# Altium PCB PCB1.PcbDoc
Units mm, origin at the board's own origin, x right, y up, seen from the top; angles counter-clockwise.
Board outline 160 x 100 mm, 2 copper layers (Top Layer, Bottom Layer), stack 1.569 mm thick; 4 components, 0 nets, 86 pads, 0 vias.
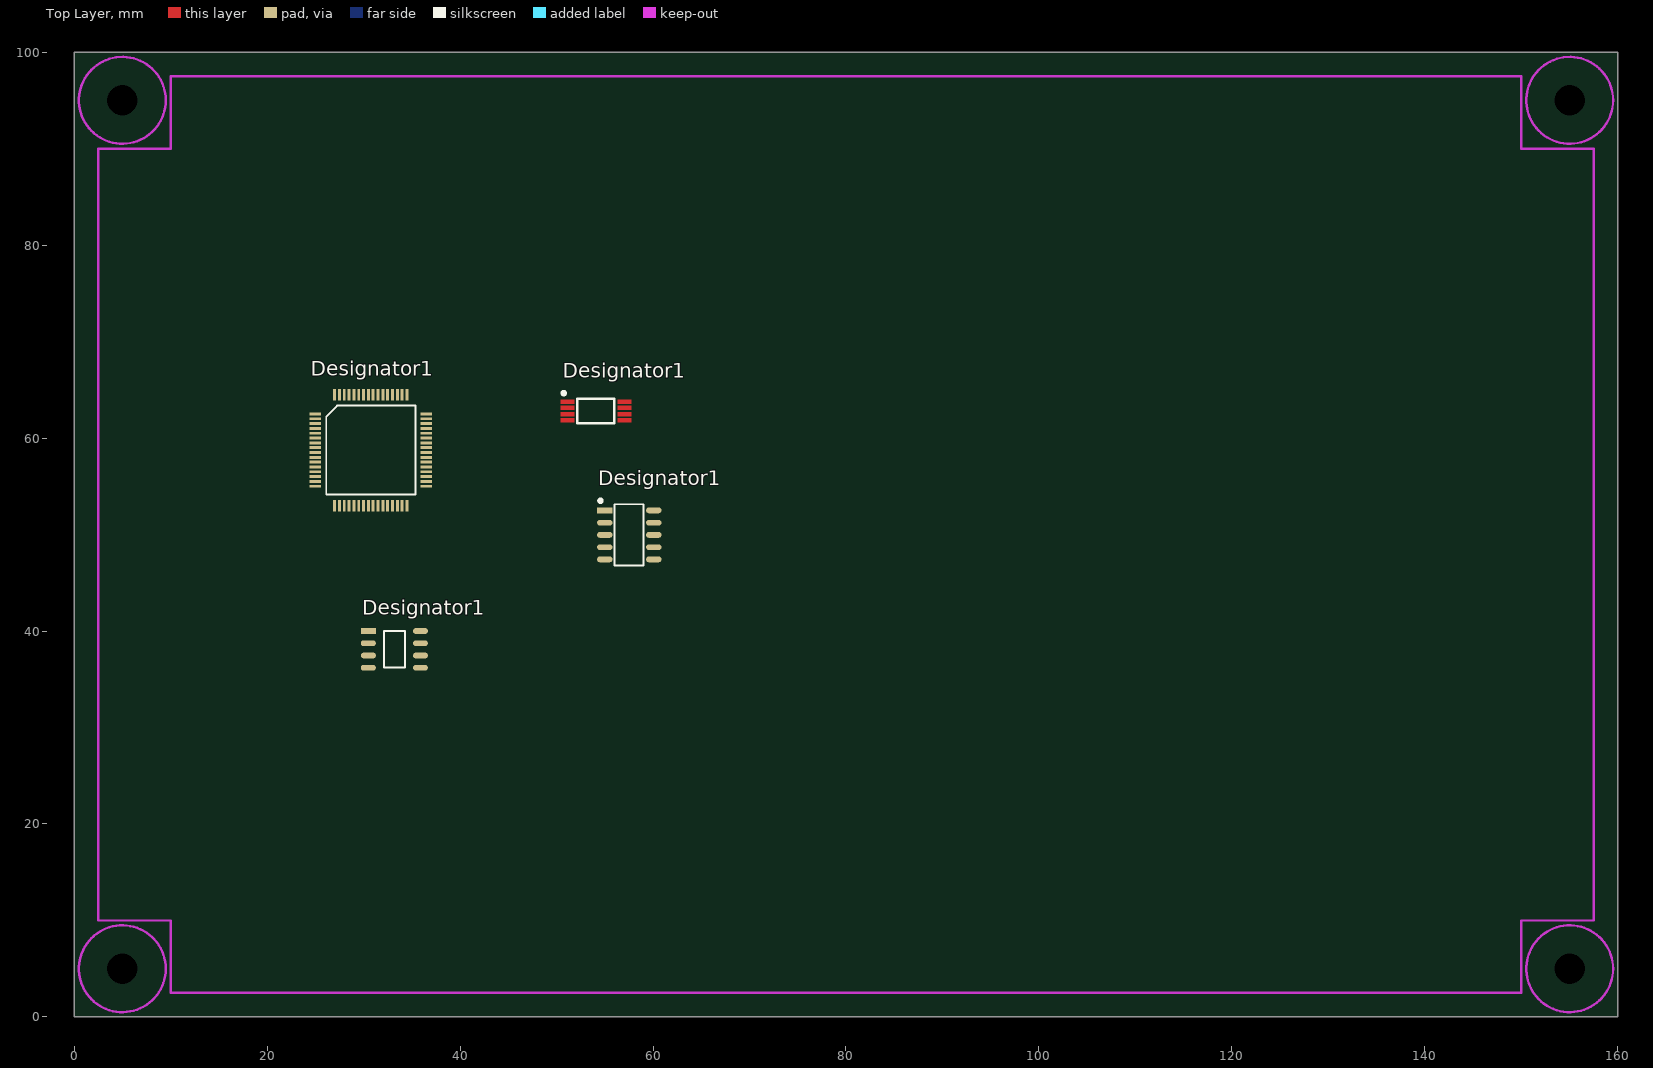
[diagram p0: Top Layer view]
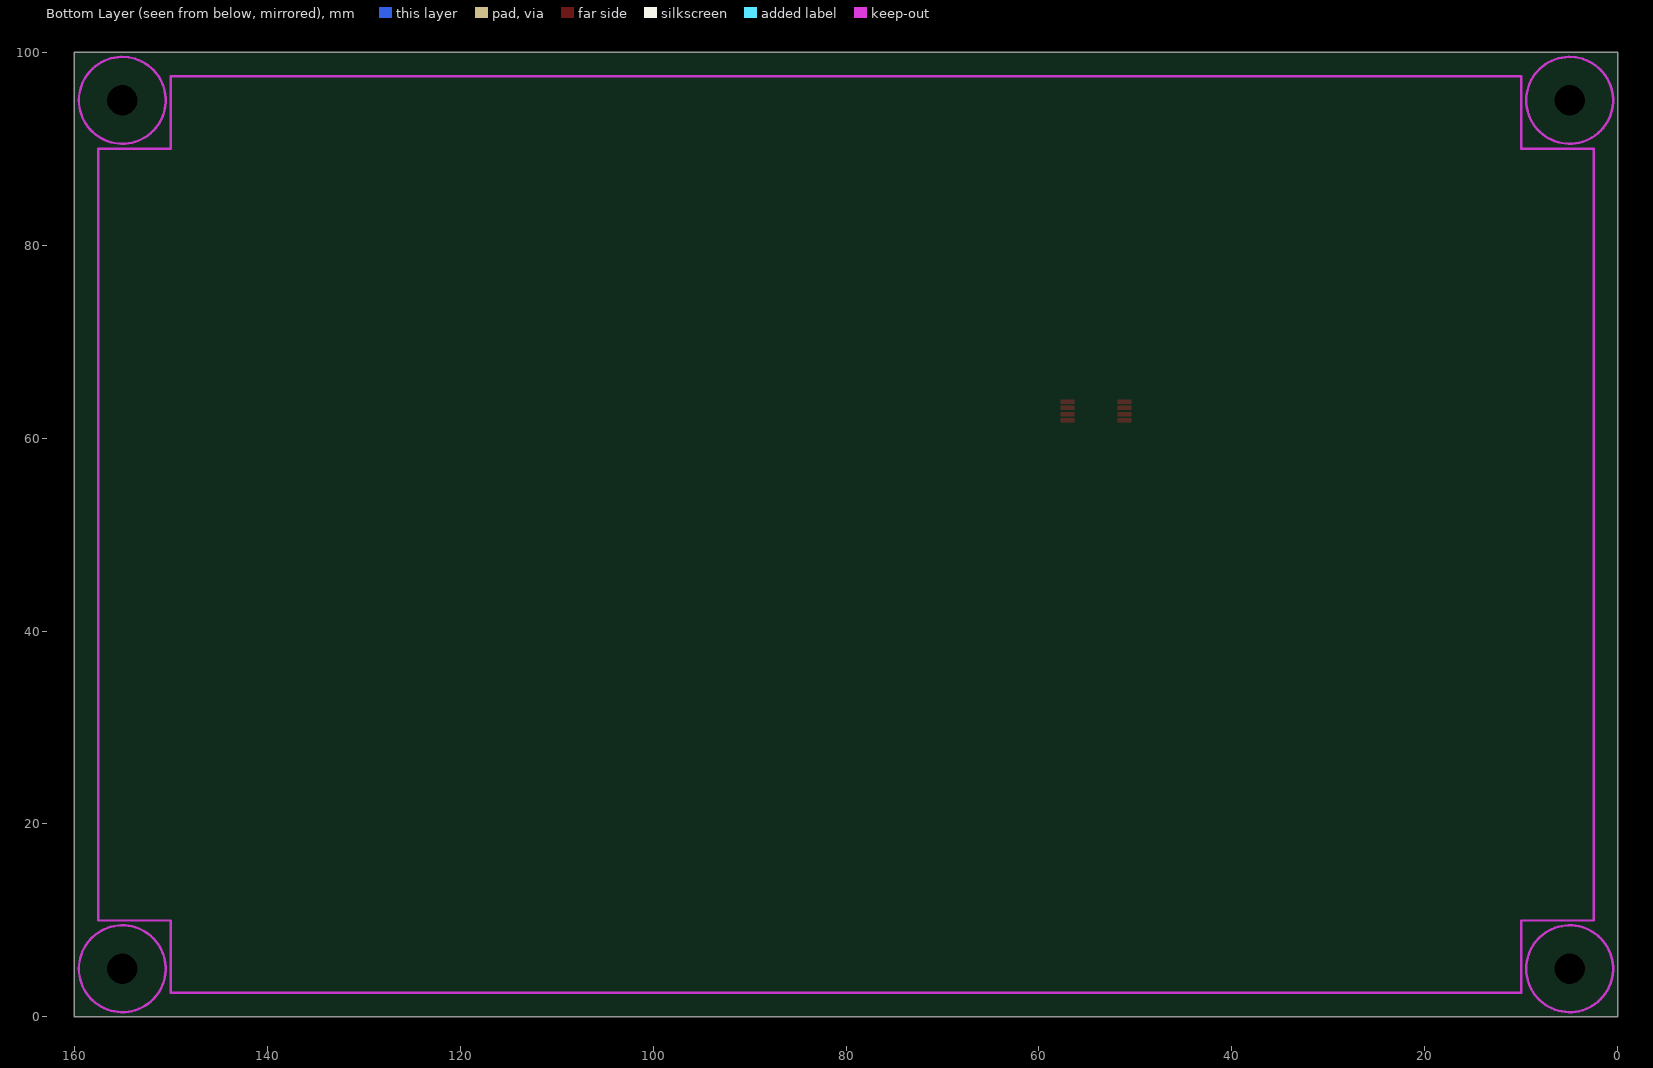
[diagram p1: Bottom Layer view, seen from below]

## Layer stack, top to bottom
Top Solder: solder mask 0.01, Solder Resist, Dk 3.5
Top Layer: signal copper 0.035
Dielectric 1: core 1.4986, Core-043, Dk 4.3
Bottom Layer: signal copper 0.035
Bottom Solder: solder mask 0.01, Solder Resist, Dk 3.5

## Board outline
0,0 0,100 160,100 160,0

## Design rules (kind name [scope] priority, off if disabled: settings)
Clearance [All] p1: gap=0.254 ignorepadtopadclearanceinfootprint=FALSE except(0: Arc-Hole Track-Hole SMDPad-Hole THPad-Hole Via-Hole Fill-Hole Poly-Hole Region-Hole Text-Hole)
PolygonConnect [All] p1: connectstyle=Relief reliefconductorwidth=0.254 reliefentries=4 polygonreliefangle="90 Angle" airgapwidth=0.254
RoutingVias [All] p1: holewidth=0.711 width=1.27 viastyle="Through Hole" minholewidth=0.711 minwidth=1.27 maxholewidth=0.711 maxwidth=1.27
SolderMaskExpansion [All] p1: expansion=0.102 istentingtop=FALSE
Width [All] p1: maxlimit=0.254 minlimit=0.254 preferedwidth=0.254
30 further rules are at their usual default settings.

## Components (designator, comment, footprint, x,y, rotation, side; value= is the part's Value field where it differs from the comment)
Designator1 "Comment" 23A1024 50,62.5 r0 top
Designator1 "Comment" "SY8205FCC SOP8" 30.5,40 r0 top
Designator1 "Comment" SN65HVD230 55.15,51.55 r0 top
Designator1 "Comment" "STM32F072 TQFP64" 25,62.5 r0 top

## Footprints (in the part's own frame and the unit in brackets; to place one, negate y for a bottom-side part, rotate by r counter-clockwise, add the part's x,y. Pads: shape width x height; smd on the part's side, far side on the other; paste and mask are expansions set on the pad)
23A1024 [mm]
  Top Layer region: 6.3,-0.9 7.75,-0.9 7.75,-0.45 6.3,-0.45
  Top Layer region: 6.3,-0.25 7.75,-0.25 7.75,0.2 6.3,0.2
  Top Layer region: 6.3,0.4 7.75,0.4 7.75,0.85 6.3,0.85
  Top Layer region: 6.3,1.05 7.75,1.05 7.75,1.5 6.3,1.5
  Top Layer region: 0.4,1.05 1.85,1.05 1.85,1.5 0.4,1.5
  Top Layer region: 0.4,0.4 1.85,0.4 1.85,0.85 0.4,0.85
  Top Layer region: 0.4,-0.25 1.85,-0.25 1.85,0.2 0.4,0.2
  Top Layer region: 0.4,-0.9 1.85,-0.9 1.85,-0.45 0.4,-0.45
  silkscreen extent 0.54,-0.95 6,2.36
SN65HVD230 [mm]
  rect 1.6x0.6 smd: 1(-0.15,0.95)
  oval 1.6x0.6 smd: 2(-0.15,-0.32) 3(-0.15,-1.59) 4(-0.15,-2.86) 5(-0.15,-4.13) 6(4.93,-4.13) 7(4.93,-2.86) 8(4.93,-1.59) 9(4.93,-0.32) 10(4.93,0.95)
  silkscreen extent -0.81,-4.76 3.85,2.16
"STM32F072 TQFP64" [mm]
  rect 1.2x0.3 smd: 1(0,0) 2(0,-0.5) 3(0,-1) 4(0,-1.5) 5(0,-2) 6(0,-2.5) 7(0,-3) 8(0,-3.5) 9(0,-4) 10(0,-4.5) 11(0,-5) 12(0,-5.5) 13(0,-6) 14(0,-6.5) 15(0,-7) 16(0,-7.5) 33(11.5,-7.5) 34(11.5,-7) 35(11.5,-6.5) 36(11.5,-6) 37(11.5,-5.5) 38(11.5,-5) 39(11.5,-4.5) 40(11.5,-4) 41(11.5,-3.5) 42(11.5,-3) 43(11.5,-2.5) 44(11.5,-2) 45(11.5,-1.5) 46(11.5,-1) 47(11.5,-0.5) 48(11.5,0)
  rect 0.3x1.2 smd: 17(2,-9.5) 18(2.5,-9.5) 19(3,-9.5) 20(3.5,-9.5) 21(4,-9.5) 22(4.5,-9.5) 23(5,-9.5) 24(5.5,-9.5) 25(6,-9.5) 26(6.5,-9.5) 27(7,-9.5) 28(7.5,-9.5) 29(8,-9.5) 30(8.5,-9.5) 31(9,-9.5) 32(9.5,-9.5) 49(9.5,2) 50(9,2) 51(8.5,2) 52(8,2) 53(7.5,2) 54(7,2) 55(6.5,2) 56(6,2) 57(5.5,2) 58(5,2) 59(4.5,2) 60(4,2) 61(3.5,2) 62(3,2) 63(2.5,2) 64(2,2)
  silkscreen extent 1.13,-8.36 10.36,0.87
"SY8205FCC SOP8" [mm]
  rect 1.55x0.6 smd: 1(0,0)
  oval 1.55x0.6 smd: 2(0,-1.27) 3(0,-2.54) 4(0,-3.81) 5(5.4,-3.81) 6(5.4,-2.54) 7(5.4,-1.27) 8(5.4,0)
  silkscreen extent 1.61,-3.8 3.79,0

## Free pads (board coordinates)
  round 3 hole 3.2 unplated: MTH1(5,5) MTH2(5,95) MTH3(155,95) MTH4(155,5)

## Nets (pads, with @x,y where several pads share a name; then routed paths per layer and width w, separated by ;. In a path a pad name is that pad's centre, name@x,y a point inside that pad or via, vN(x,y) a via of type N, cw(c..) or ccw(c..) an arc to the next point about the centre after c; other vN are vias at no path point)
pads on no net: Designator1.1 Designator1.2 Designator1.3 Designator1.4 Designator1.5 Designator1.6 Designator1.7 Designator1.8 Designator1.9 Designator1.10 Designator1.11 Designator1.12 Designator1.13 Designator1.14 Designator1.15 Designator1.16 Designator1.17 Designator1.18 Designator1.19 Designator1.20 Designator1.21 Designator1.22 Designator1.23 Designator1.24 Designator1.25 Designator1.26 Designator1.27 Designator1.28 Designator1.29 Designator1.30 Designator1.31 Designator1.32 Designator1.33 Designator1.34 Designator1.35 Designator1.36 Designator1.37 Designator1.38 Designator1.39 Designator1.40 Designator1.41 Designator1.42 Designator1.43 Designator1.44 Designator1.45 Designator1.46 Designator1.47 Designator1.48 Designator1.49 Designator1.50 Designator1.51 Designator1.52 Designator1.53 Designator1.54 Designator1.55 Designator1.56 Designator1.57 Designator1.58 Designator1.59 Designator1.60 Designator1.61 Designator1.62 Designator1.63 Designator1.64

## Keep-outs
Keep-Out Layer:
  circle w0.25: c5,95 r4.5
  circle w0.25: c155,95 r4.5
  circle w0.25: c155,5 r4.5
  circle w0.25: c5,5 r4.5
  lines w0.254: 2.5,10 2.5,90 10,90 10,97.5 150,97.5 150,90 157.5,90 157.5,10 150,10 150,2.5 10,2.5 10,10 2.5,10

## Silkscreen, mask and mechanical layers (free items; w line width, h text height)
Board Outline:
  the board outline again, w0.25

## Dimensions
155,95 to 171.075,107.95 on Board Dimensions
160,100 to 160,0 on Board Dimensions
0,100 to 160,100 on Board Dimensions